# EAGLE board Board file (EAGLE 8.5.2)
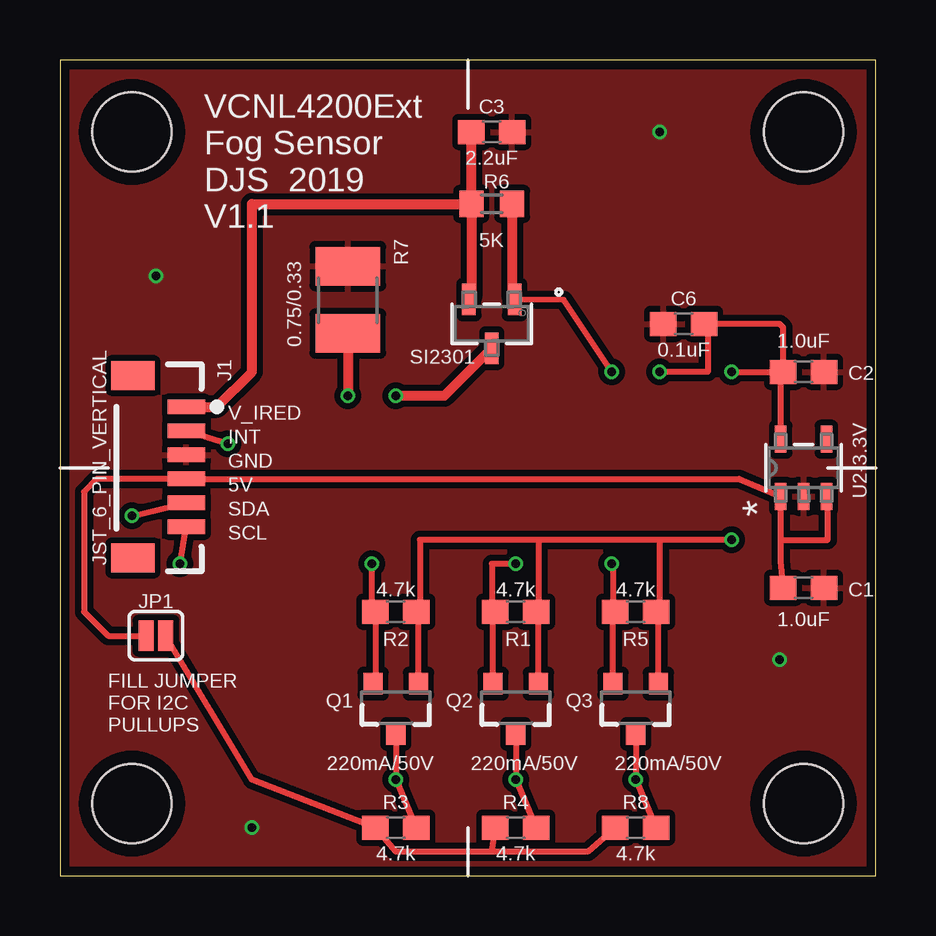
[diagram p0: board, top side]
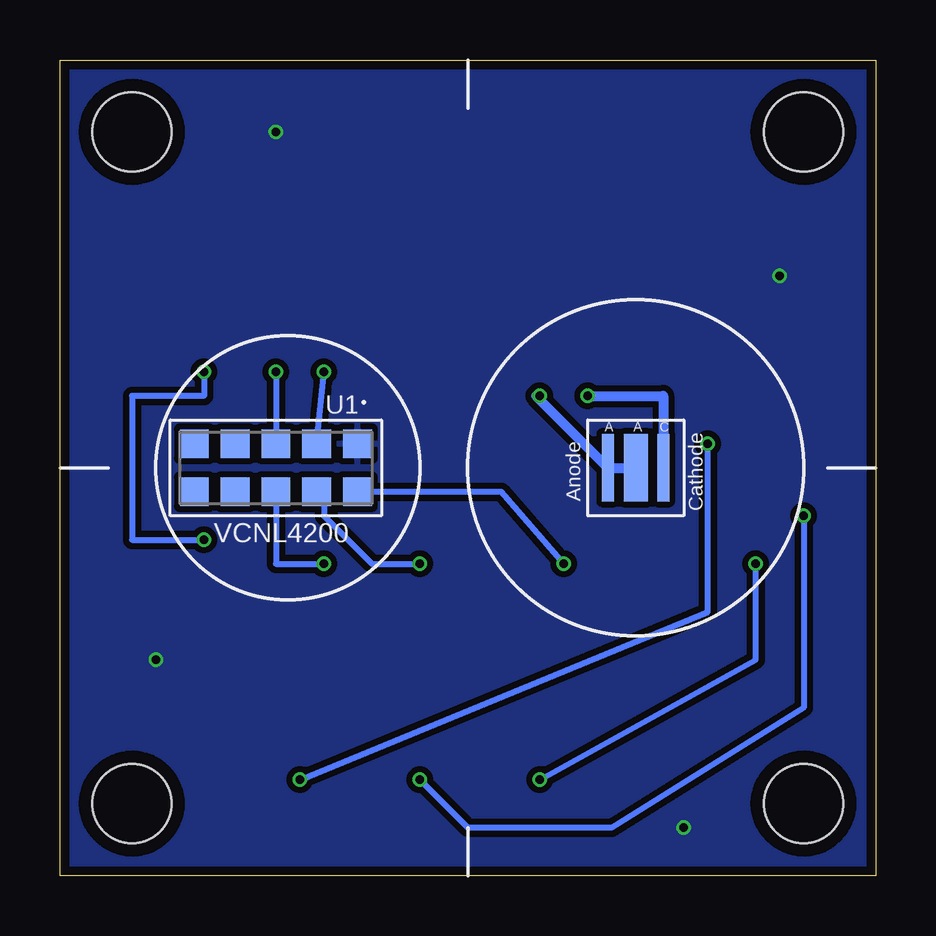
[diagram p1: board, bottom side, seen from below]

Size 34 x 34 mm. Coordinates in mm from the lower left corner, seen from the top.
Outline: 0,0 34,0 34,34 0,34 0,0
Copper layers (1*16): Top 0.035559375mm / dielectric 1.6mm / Bottom 0.035559375mm
Design rules "oshpark-2layer-tented": minimum track width 6mil, minimum drill 10mil, track to track 6mil, track to pad 6mil, pad to pad 6mil, via to via 6mil, smd to smd 6mil, copper to edge 15mil, drill to drill 6mil, minimum pad ring 5mil, minimum via ring 5mil, stop-mask expansion 2.5mil, vias tented up to drill 20mil, thermal gap 10mil

## Footprints (pad centres in the part's own frame; a part is rotated, then mirrored left to right if it is on the bottom)
0603 = smd 1.1 x 1: 1 -0.85,0; 2 0.85,0
JST-6-SMD-VERT-1.0MM = smd 0.6 x 1.55: 1 -2.54,1.27; 2 -1.54,1.27; 3 -0.54,1.27; 4 0.46,1.27; 5 1.46,1.27; 6 2.46,1.27 | smd 1.2 x 1.8: P$1 -3.84,-0.955; P$2 3.76,-0.955
SMT-JUMPER_2_NO_SILK = smd 0.635 x 1.27: 1 -0.406,0; 2 0.406,0
SOT23-3 = smd 0.8 x 0.9: 1 -0.95,-1; 2 0.95,-1; 3 0,1.1
R0603 = smd 1 x 1.1: 1 -0.85,0; 2 0.85,0
R1210 = smd 1.6 x 2.7: 1 -1.4,0; 2 1.4,0
TO-236 = smd 0.559 x 1.321: 1 -0.95,-1.016; 2 0.95,-1.016; 3 0,1.016
VISHAY_VCNL4100_8X3X1.8 = smd 1.2 x 1.2: 1 -1,3.4; 2 -1,1.7; 3 -1,0; 4 -1,-1.7; 5 -1,-3.4; 6 1,-3.4; 7 1,-1.7; 8 1,0; 9 1,1.7; 10 1,3.4
SOT-25 = smd 1.118 x 0.483: 1 -1.194,0.95; 2 -1.194,0; 3 -1.194,-0.95; 4 1.194,-0.95; 5 1.194,0.95
STAND-OFF = hole 3.302: 0,0
VSMY99445DS = smd 1 x 2.8: P$1 0,0 | smd 0.5 x 2.8: P$2 -1.15,0; P$3 1.15,0

## Placement (x,y rotation side)
C1  1.0uF  [0603]  31,12 0 top
C2  1.0uF  [0603]  31,21 0 top
C3  2.2uF  [0603]  18,31 0 top
C6  0.1uF  [0603]  26,23 0 top
J1  JST_6_PIN_VERTICAL  [JST-6-SMD-VERT-1.0MM]  4,17 270 top
JP1  JUMPER-SMT_2_NO_SILK  [SMT-JUMPER_2_NO_SILK]  4,10 0 top
Q1  220mA/50V  [SOT23-3]  14,7 180 top
Q2  220mA/50V  [SOT23-3]  19,7 180 top
Q3  220mA/50V  [SOT23-3]  24,7 180 top
R1  4.7k  [0603]  19,11 0 top
R2  4.7k  [0603]  14,11 0 top
R3  4.7k  [0603]  14,2 0 top
R4  4.7k  [0603]  19,2 0 top
R5  4.7k  [0603]  24,11 0 top
R6  5K  [R0603]  18,28 0 top
R7  0.75/0.33  [R1210]  12,24 270 top
R8  4.7k  [0603]  24,2 0 top
SI2301  SI2301CDS-T1-GE3  [TO-236]  18,23 180 top
U1  VCNL4200  [VISHAY_VCNL4100_8X3X1.8]  25,17 270 bottom
U2-3.3V  XC6221B182MR-G  [SOT-25]  31,17 90 top
U$1  [STAND-OFF]  31,31 0 top
U$2  [STAND-OFF]  31,3 0 top
U$3  [STAND-OFF]  3,3 0 top
U$4  [STAND-OFF]  3,31 0 top
U$5  VSMY99445DS  [VSMY99445DS]  10,17 0 bottom

## Library data of the parts
C1 C2 = SparkFun-Capacitors; PROD_ID: CAP-00868
C3 = SparkFun-Capacitors; PROD_ID: CAP-07888
C6 = SparkFun-Capacitors; PROD_ID: CAP-00810
J1 = SparkFun-Connectors; PROD_ID: CONN-08249; SF_ID: GPS-00579
JP1 = SparkFun-Jumpers
Q1-Q3 = SparkFun-DiscreteSemi; PROD_ID: TRANS-00830
R1-R5 R8 = SparkFun-Resistors; PROD_ID: RES-07857
R6 R7 = resistor
SI2301 = Vishay_SI2301CDS-TI-GE3; MANUFACTURER_PART_NUMBER: SI2301CDST1GE3; VENDOR: Vishay
U1 = VCNL4100_8X3X1.8
U2-3.3V = V_REG_XC6221B182MR-GSOT-25-L_1.8V; MANUFACTURER_PART_NUMBER: XC6221B182MRG; VENDOR: Torex Semiconductor
U$1-U$4 = SparkFun-Hardware
U$5 = DJS_Eagle_Library

## Nets
3.3V: C2.1 C6.2 Q1.1 Q2.1 Q3.1 R1.2 R2.2 R5.2 U1.3 U2-3.3V.5
5V: C1.1 J1.4 JP1.1 U2-3.3V.1 U2-3.3V.3
GND: C1.2 C2.2 C3.2 C6.1 J1.3 R7.1 U1.1 U2-3.3V.2
INT: J1.2 Q3.3 R8.2
JMPR: JP1.2 R3.1 R4.1 R8.1
LED++: SI2301.3 U$5.P$1 U$5.P$2
LED--: R7.2 U$5.P$3
LED_CATH: R6.2 SI2301.1 U1.2
LINT: Q3.2 R5.1 U1.8
LSCL: Q1.2 R2.1 U1.10
LSDA: Q2.2 R1.1 U1.9
SCL: J1.6 Q1.3 R3.2
SDA: J1.5 Q2.3 R4.2
VIN: C3.1 J1.1 R6.1 SI2301.2

## Tracks (layer width: path | path; a pad name or v marks a point on that pad's centre or on a via)
3.3V  (via drill 0.35)
  Top 0.152: 29.95,21 30.05,20.9
  Top 0.254: v28,14 25,14 | 25,14 20,14 | 20,14 15,14 15,11.14 14.93,11.07 | R2.2 14.93,11.07 | U2-3.3V.5 30.05,20.9 C2.1 30.15,22.85 30,23 C6.2 27,22.85 27,21 v25,21 | Q1.1 14.95,11.05 14.93,11.07 | Q2.1 19.95,10.9 | 19.95,10.9 R1.2 | Q3.1 24.95,11.05 24.93,11.07 R5.2 25,11.15 25,14 | 20,14 19.95,13.95 19.95,10.9 | v28,21 29.95,21
  Bottom 0.254: v25,21 U1.3 | v28,21 28,20 31,20 31,14 v28,14
5V
  Top 0.254: JP1.1 2,10 1,11 1,16 1.54,16.54 J1.4 28.32,16.54 U2-3.3V.1 30.05,14 | C1.1 30.05,13.1 30.05,14 | 30.05,14 32,14 32,15.76 U2-3.3V.3
GND  (via drill 0.35)
  other vias: 8,2 30,9 25,31 4,25
  pour Top (isolate 0.254): 0,0 0,34 34,34 34,0
  pour Bottom (isolate 0.254): 0,0 0,34 34,34 34,0
INT  (via drill 0.35)
  Top 0.254: Q3.3 v24,4 R8.2 | v7,18 J1.2
  Bottom 0.254: v24,4 7,11 v7,18
JMPR
  Top 0.254: R8.1 22,1 18,1 | 18,1 R4.1 | 18,1 14,1 R3.1 8,4 JP1.2
LED++  (via drill 0.35)
  Top 0.406: SI2301.3 16.02,20 v14,20
  Bottom 0.406: U$5.P$1 U$5.P$2 14.15,20 v14,20
LED--  (via drill 0.35)
  Top 0.406: R7.2 v12,20
  Bottom 0.406: v12,20 8.85,20 U$5.P$3
LED_CATH  (via drill 0.35)
  Top 0.254: SI2301.1 19,24.02 21,24 v23,21
  Top 0.406: R6.2 18.85,24.17 19,24.02
  Bottom 0.254: U1.2 v23,21
LINT  (via drill 0.35)
  Top 0.254: R5.1 23.05,10.91 | Q3.2 23.05,10.91 | v23,13 23.05,12.95 23.05,10.91
  Bottom 0.254: U1.8 25,13 v23,13
LSCL  (via drill 0.35)
  Top 0.254: v13,13 13,11.15 R2.1 13.15,8.1 Q1.2
  Bottom 0.254: v13,13 15.6,16 U1.10
LSDA  (via drill 0.35)
  Top 0.254: Q2.2 18.05,10.9 | 18.05,10.9 R1.1 | v19,13 18,13 18,10.95 18.05,10.9
  Bottom 0.254: U1.9 23,15.7 23,15 21,13 v19,13
SCL  (via drill 0.35)
  Top 0.254: Q1.3 v14,4 R3.2 | v5,13 J1.6
  Bottom 0.254: v14,4 5,9 v5,13
SDA  (via drill 0.35)
  Top 0.254: Q2.3 v19,4 R4.2 | v3,15 J1.5
  Bottom 0.254: v3,15 3,7 11,2 17,2 v19,4
VIN
  Top 0.406: R6.1 C3.1 | J1.1 6.54,19.54 8,21 8,28 R6.1 | R6.1 17.15,24.12 SI2301.2

## Text on the board
tPlace: VCNL4200Ext / Fog Sensor / DJS 2019 / V1.1 | V_IRED | INT | GND | 5V | SDA | SCL | FILL JUMPER / FOR I2C / PULLUPS